# Altium PCB HVPowerModule.PcbDoc (part 1 of 2)
Units mm, origin at the board's own origin, x right, y up, seen from the top; angles counter-clockwise.
Board outline 100 x 60 mm, 2 copper layers (Top Layer, Bottom Layer); 105 components, 66 nets, 450 pads, 567 vias.
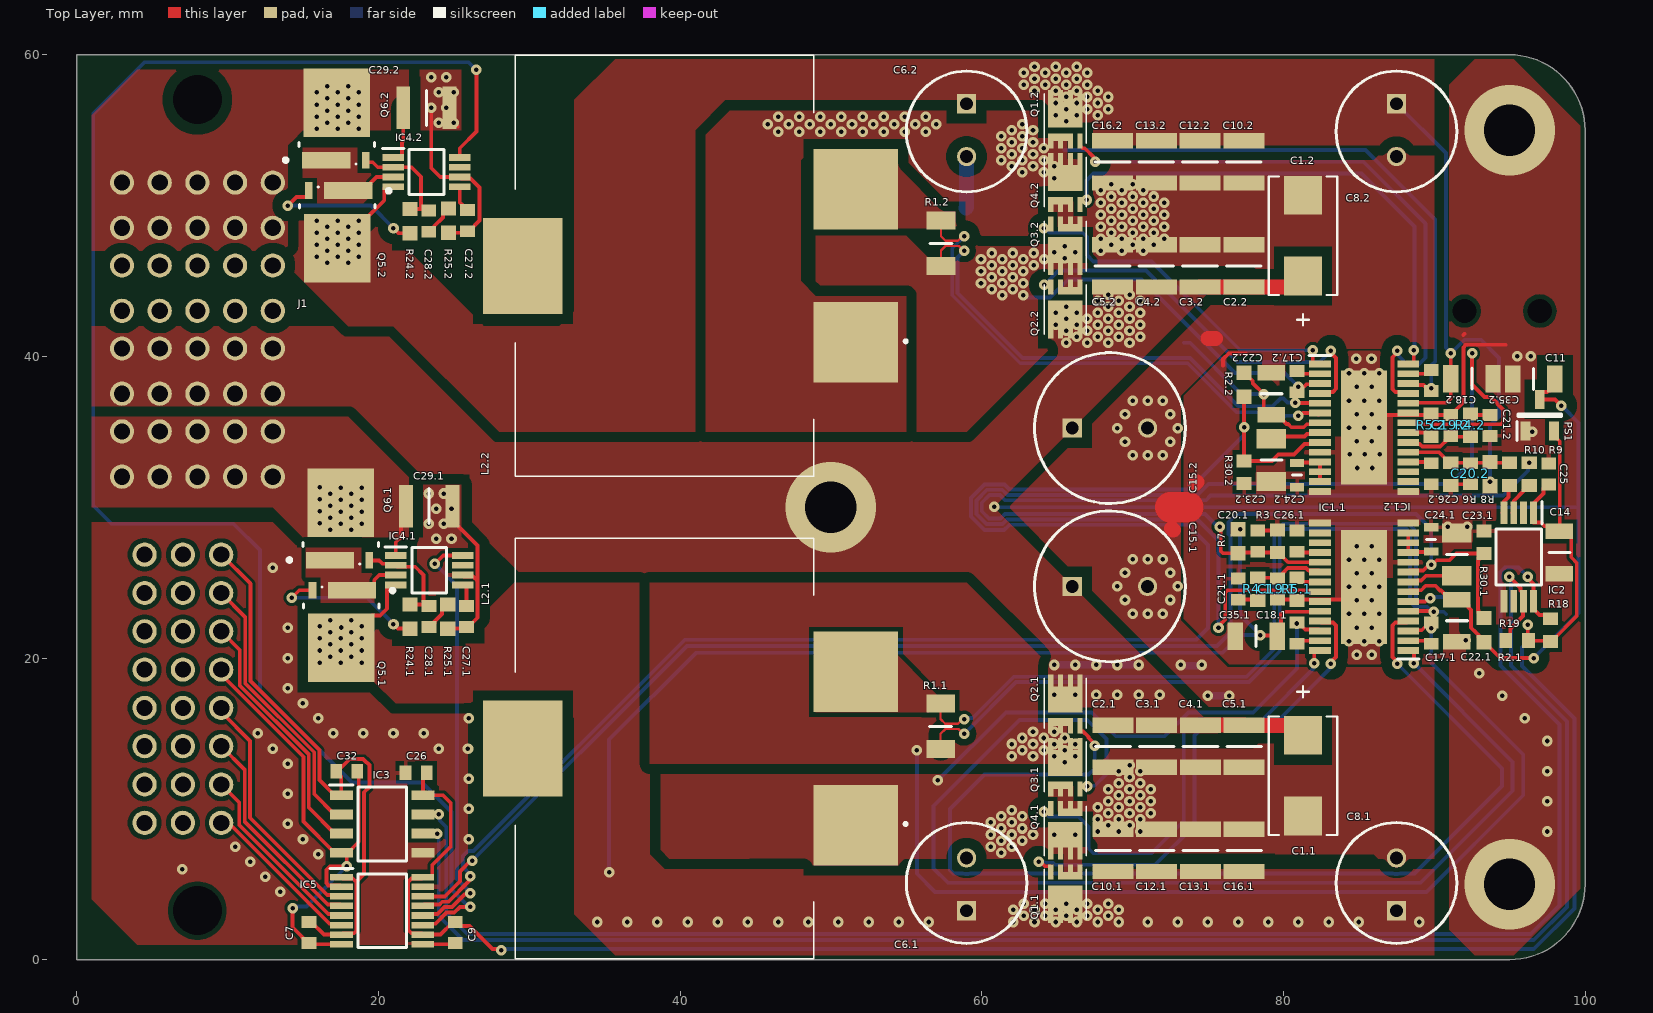
[diagram p0: Top Layer view]
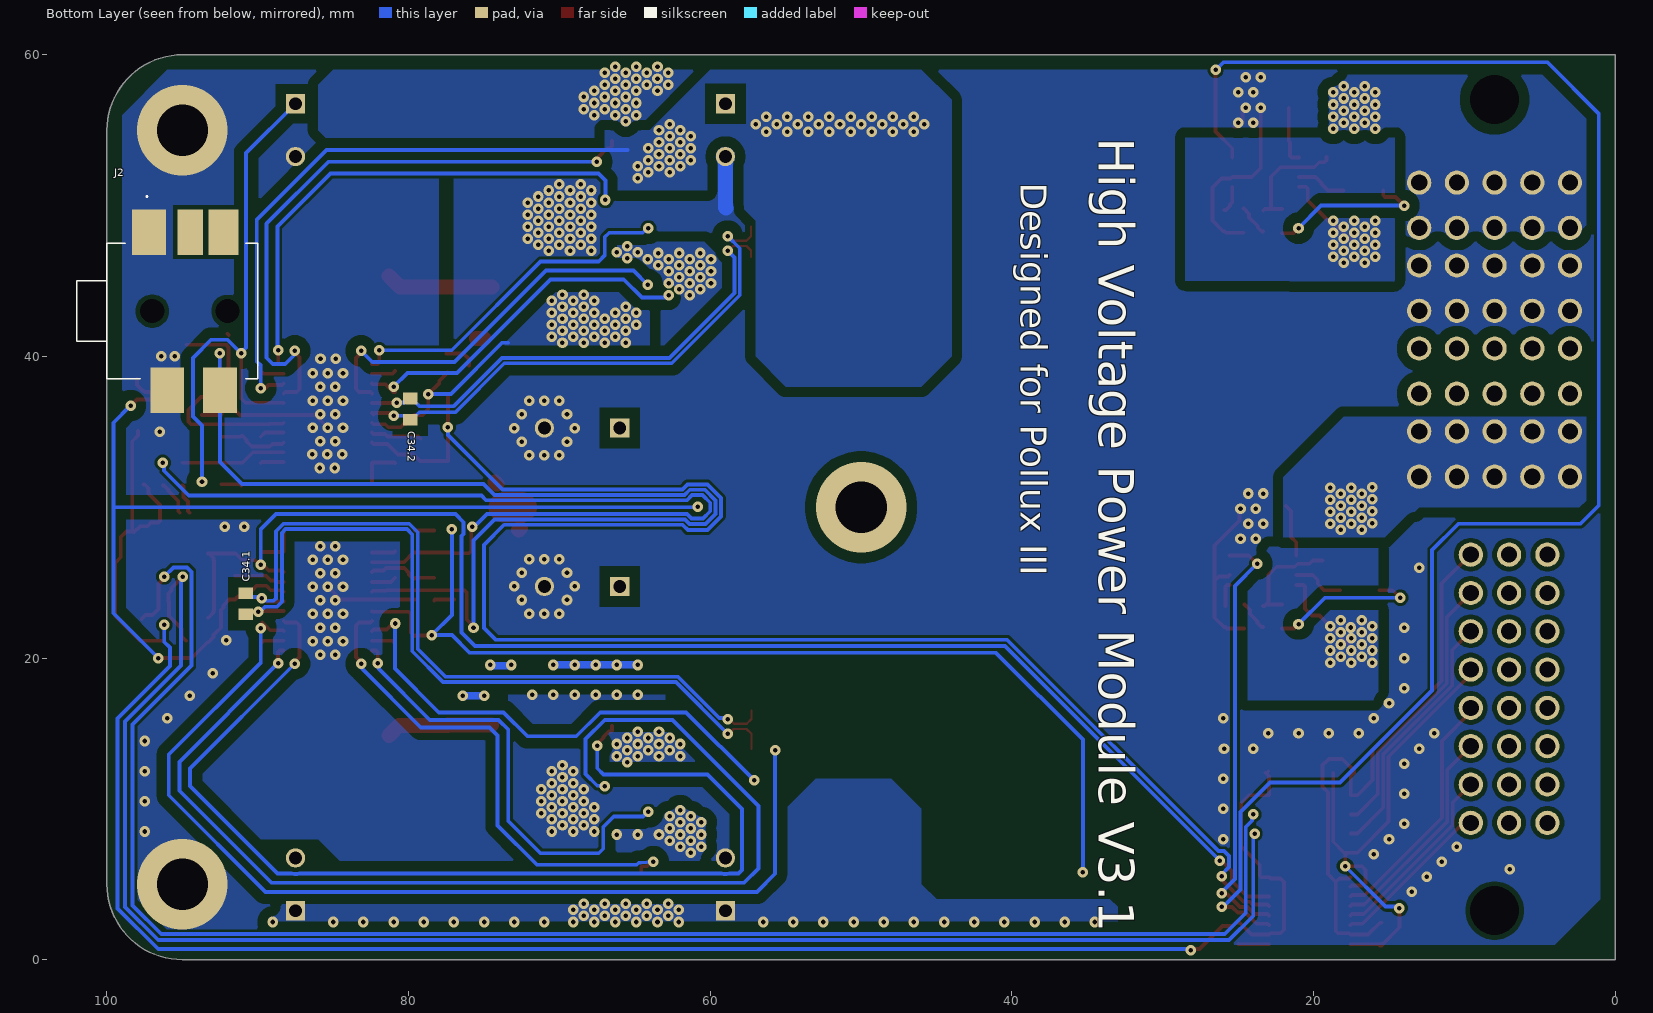
[diagram p1: Bottom Layer view, seen from below]
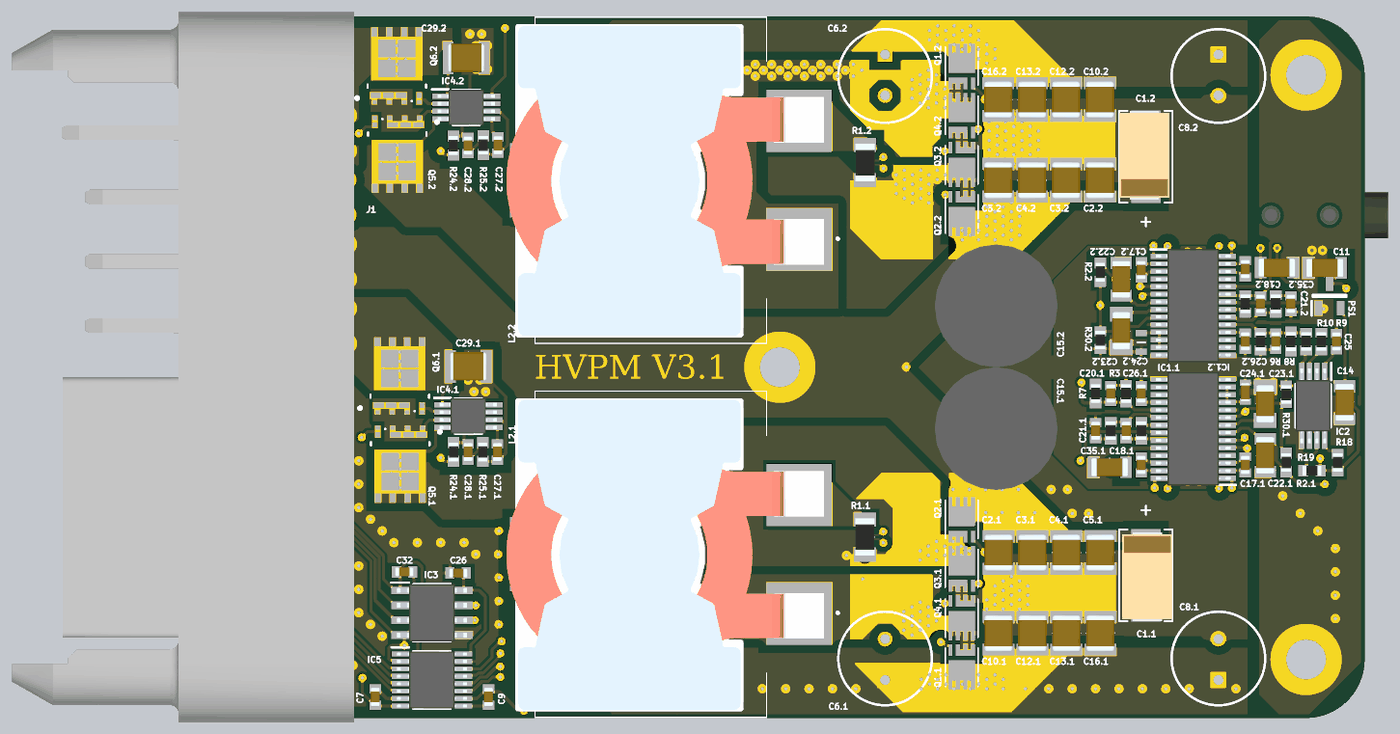
[diagram p3: 3D render of the assembled board from above, using the file's embedded part models]
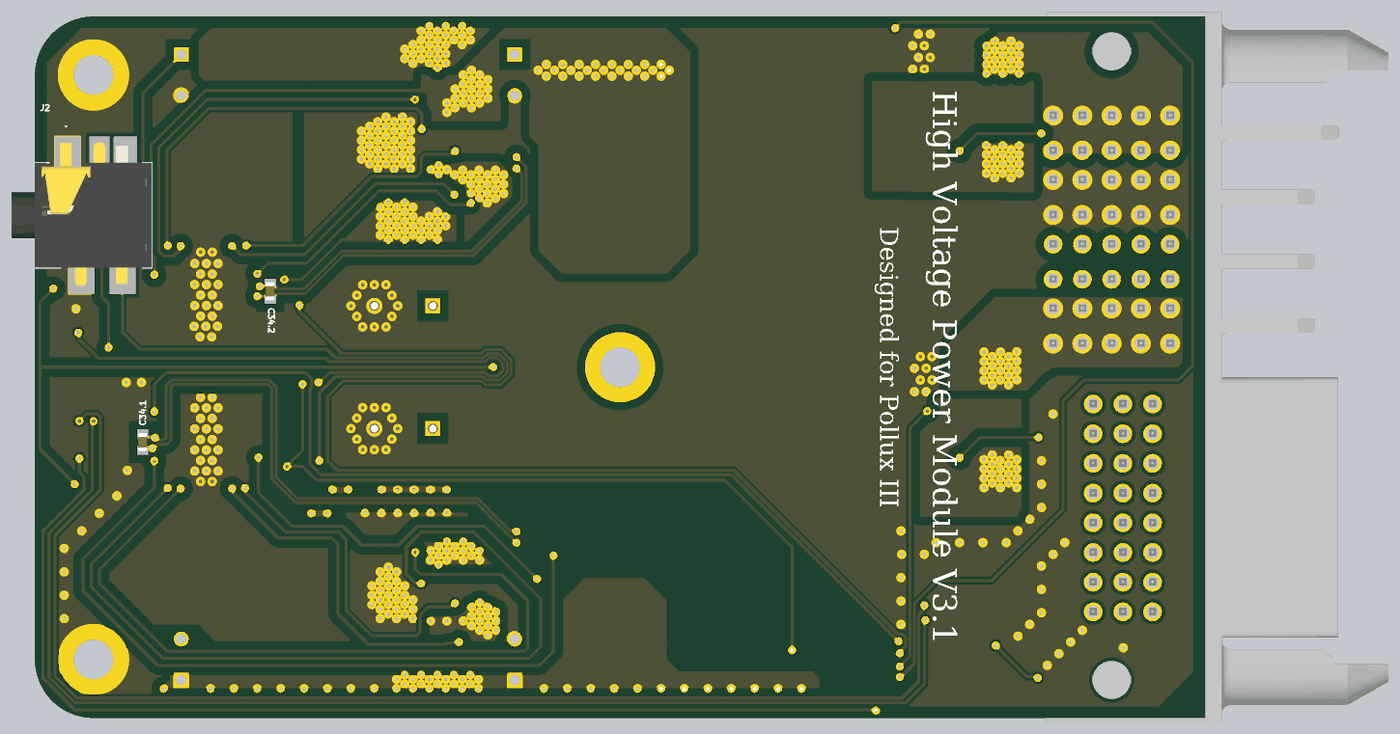
[diagram p4: 3D render of the assembled board from below, using the file's embedded part models]

## Layer stack, top to bottom
Top Solder: solder mask 0.0102, Solder Resist, Dk 3.5
Top Layer: signal copper 0.035
Dielectric 1: dielectric 0.32, FR-4, Dk 4.8
Bottom Layer: signal copper 0.035
Bottom Solder: solder mask 0.0102, Solder Resist, Dk 3.5

## Board outline
0,0 0,60 94.987,60 cw(c94.987,54.987) 100,54.987 100,5 cw(c95,5) 95,0

## Design rules (kind name [scope] priority, off if disabled: settings)
Clearance "High voltage Clearance 2" [InNetClass('HV2') vs Not InNetClass('HV1')] p1: gap=0.7 ignorepadtopadclearanceinfootprint=TRUE except(0.1: Arc-Text Track-Text SMDPad-Text THPad-Text Via-Text Fill-Text Poly-Text Region-Text Text-Text Text-Hole; 0.2: Arc-Arc Arc-Track Arc-SMDPad Track-Track Track-SMDPad; 0.3: Arc-THPad Arc-Via Arc-Hole Track-THPad Track-Via Track-Hole SMDPad-SMDPad SMDPad-THPad SMDPad-Via SMDPad-Hole THPad-Hole Via-Hole; 0.4: THPad-THPad THPad-Via Via-Via)
Clearance "High voltage Clearance 3" [InNetClass('HV3') vs Not InNetClass('HV4')] p2: gap=0.7 ignorepadtopadclearanceinfootprint=TRUE except(0.1: Arc-Text Track-Text SMDPad-Text THPad-Text Via-Text Fill-Text Poly-Text Region-Text Text-Text Text-Hole; 0.2: Arc-Arc Arc-Track Arc-SMDPad Track-Track Track-SMDPad; 0.3: Arc-THPad Arc-Via Arc-Hole Track-THPad Track-Via Track-Hole SMDPad-SMDPad SMDPad-THPad SMDPad-Via SMDPad-Hole THPad-Hole Via-Hole; 0.4: THPad-THPad THPad-Via Via-Via)
Clearance "High voltage Clearance 4" [InNetClass('HV4') vs Not InNetClass('HV3')] p3: gap=0.7 ignorepadtopadclearanceinfootprint=TRUE except(0.1: Arc-Text Track-Text SMDPad-Text THPad-Text Via-Text Fill-Text Poly-Text Region-Text Text-Text Text-Hole; 0.2: Arc-Arc Arc-Track Arc-SMDPad Track-Track Track-SMDPad; 0.3: Arc-THPad Arc-Via Arc-Hole Track-THPad Track-Via Track-Hole SMDPad-SMDPad SMDPad-THPad SMDPad-Via SMDPad-Hole THPad-Hole Via-Hole; 0.4: THPad-THPad THPad-Via Via-Via)
Clearance "High voltage Clearance 1" [InNetClass('HV1') vs Not InNetClass('HV2')] p4: gap=0.7 ignorepadtopadclearanceinfootprint=TRUE except(0.1: Arc-Text Track-Text SMDPad-Text THPad-Text Via-Text Fill-Text Poly-Text Region-Text Text-Text Text-Hole; 0.2: Arc-Arc Arc-Track Arc-SMDPad Track-Track Track-SMDPad; 0.3: Arc-THPad Arc-Via Arc-Hole Track-THPad Track-Via Track-Hole SMDPad-SMDPad SMDPad-THPad SMDPad-Via SMDPad-Hole THPad-Hole Via-Hole; 0.4: THPad-THPad THPad-Via Via-Via)
Clearance "General High voltage Clearance" [InNetClass('HV')] p5: gap=0.7 ignorepadtopadclearanceinfootprint=TRUE except(0.1: Arc-Text Track-Text SMDPad-Text THPad-Text Via-Text Fill-Text Poly-Text Region-Text Text-Text Text-Hole; 0.2: Arc-Arc Arc-Track Arc-SMDPad Track-Track Track-SMDPad; 0.3: Arc-THPad Arc-Via Arc-Hole Track-THPad Track-Via Track-Hole SMDPad-SMDPad SMDPad-THPad SMDPad-Via SMDPad-Hole THPad-Hole Via-Hole; 0.4: THPad-THPad THPad-Via Via-Via)
Clearance [All] p6: gap=0.102 ignorepadtopadclearanceinfootprint=TRUE except(0.2: Arc-Fill Arc-Poly Arc-Region Track-Fill Track-Poly Track-Region Via-Fill Via-Poly Via-Region; 0.3: SMDPad-Fill SMDPad-Poly SMDPad-Region THPad-Fill THPad-Poly THPad-Region Fill-Fill Fill-Poly Fill-Region Poly-Poly Poly-Region Region-Region)
ComponentClearance [All] p1 off: gap=0.254 collisioncheckmode=3 verticalgap=0.254 showdistances=FALSE
Height [All] p1 off: minheight=0 maxheight=25.4 prefheight=12.7
HoleSize [All] p1: absolutevalues=TRUE maxlimit=5 minlimit=0.2 maxpercent=80.000 minpercent=20.000
HoleToHoleClearance [All] p1: gap=0.4 allowstackedmicrovias=TRUE
MinimumSolderMaskSliver [All] p1: minsoldermaskwidth=0.05
NetAntennae [All] p1: netantennaetolerance=1
PlaneConnect [All] p1: planeconnectstyle=Direct reliefexpansion=0.508 reliefentries=4 reliefconductorwidth=0.254 reliefairgap=0.254
PolygonConnect [HasFootprint('*1608*')] p1: connectstyle=Relief reliefconductorwidth=0.254 reliefentries=4 polygonreliefangle="90 Angle" airgapwidth=0.254
PolygonConnect PolygonConnect_1 [All] p2: connectstyle=Direct reliefconductorwidth=0.254 reliefentries=4 polygonreliefangle="90 Angle" airgapwidth=0.254
RoomDefinition DAC [InComponentClass('DAC')] p1: confinementstyle=ConfineIn formatcopy=TRUE lockcomponents=FALSE outline -25.4,-27.9 25.4,-27.9 25.4,-2.5 -25.4,-2.5
RoomDefinition 24VB [InComponentClass('24VB')] p2: confinementstyle=ConfineIn formatcopy=TRUE lockcomponents=FALSE outline -25.4,-27.9 25.4,-27.9 25.4,-2.5 -25.4,-2.5
RoomDefinition D2 [InComponentClass('D2')] p3 off: confinementstyle=ConfineIn formatcopy=TRUE lockcomponents=FALSE outline 101.1,12.1 110.1,12.1 110.1,21.4 101.1,21.4
RoomDefinition D1 [InComponentClass('D1')] p4 off: confinementstyle=ConfineIn formatcopy=TRUE lockcomponents=FALSE outline 101.1,1.5 109.6,1.5 109.6,10.8 101.1,10.8
RoomDefinition Module [InComponentClass('Module')] p5 off: confinementstyle=ConfineIn formatcopy=TRUE lockcomponents=FALSE outline 59.25,-10.5 2,-10.5 2,-16.5 59.25,-16.5
RoomDefinition 24VA [InComponentClass('24VA')] p6 off: confinementstyle=ConfineIn formatcopy=TRUE lockcomponents=FALSE outline -25.4,-27.9 25.4,-27.9 25.4,-2.5 -25.4,-2.5
RoutingVias [All] p1: holewidth=0.711 width=1.27 viastyle="Through Hole" minholewidth=0.2 minwidth=0.4 maxholewidth=0.711 maxwidth=1.27
SilkToSilkClearance [All] p1: silktosilkclearance=0.2
SilkToSolderMaskClearance [IsPad] p1: minsilkscreentomaskgap=0.1 clearancetoexposedcopper=TRUE
SolderMaskExpansion [All] p1: expansion=0.05 istentingtop=FALSE
Width [All] p1: maxlimit=2 minlimit=0.1 preferedwidth=0.254
21 further rules are at their usual default settings.

## Classes and differential pairs
net class HV1: SW1.1 SW1.2
channel class Converter: 24VA 24VB
component class 24VA: C1.1 C1.1.1 C2.1 C3.1 C4.1 C5.1 C6.1 C8.1 C10.1 C10.1.1 C12.1 C12.1.1 C13.1 C13.1.1 C15.1 C16.1 C16.1.1 C17.1 C18.1 C19.1 C20.1 C21.1 C22.1 C23.1 C24.1 C26.1 C34.1 C35.1 IC1.1 L2.1 L2.1.1 Q1.1 Q2.1 Q3.1 Q4.1 R1.1 R1.1.1 R2.1 R4.1 R5.1 R30.1
component class 24VB: C1.1.2 C1.2 C2.2 C3.2 C4.2 C5.2 C6.2 C8.2 C10.1.2 C10.2 C12.1.2 C12.2 C13.1.2 C13.2 C15.2 C16.1.2 C16.2 C17.2 C18.2 C19.2 C20.2 C21.2 C22.2 C23.2 C24.2 C26.2 C34.2 C35.2 IC1.2 L2.1.2 L2.2 Q1.2 Q2.2 Q3.2 Q4.2 R1.1.2 R1.2 R2.2 R4.2 R5.2 R30.2
net class HV: 24V.1 24V.2 24VA_OUT 24VB_OUT HDRV1.1 HDRV1.2 HDRV2.1 HDRV2.2 SW2.1 SW2.2 V_IN
channel class IdealDiode: D1 D2
component class D2: C27.2 C28.2 C29.2 IC4.2 IC4_15V_Diode2 Q5.2 Q6.2 R24.2 R25.2
component class D1: C27.1 C28.1 C29.1 IC4.1 IC4_15V_Diode1 Q5.1 Q6.1 R24.1 R25.1
component class DAC: C25 C26 C32 IC2 IC3 R18 R19
net class HV2: LSN.1 LSN.2
component class Module: C7 C9 C11 C14 IC5 J1 J2 PS1 R3 R6 R7 R8 R9 R10

## Components (designator, comment, footprint, x,y, rotation, side; value= is the part's Value field where it differs from the comment)
C1.1 "T598D336M035ATE065" CAPMP7.6X4.3_3.1N_KEM 81.3,12.2 r270 top value=33u (schematic designator C1)
C1.2 "T598D336M035ATE065" CAPMP7.6X4.3_3.1N_KEM 81.3,48 r90 top value=33u (schematic designator C1)
C2.1 "CGA6P1X7R1N106M250AC" CAPC3225X280N 68.7,14.15 r90 top value=10u (schematic designator C2)
C2.2 "CGA6P1X7R1N106M250AC" CAPC3225X280N 77.375,46 r270 top value=10u (schematic designator C2)
C3.1 "CGA6P1X7R1N106M250AC" CAPC3225X280N 71.6,14.15 r90 top value=10u (schematic designator C3)
C3.2 "CGA6P1X7R1N106M250AC" CAPC3225X280N 74.475,46 r270 top value=10u (schematic designator C3)
C4.1 "CGA6P1X7R1N106M250AC" CAPC3225X280N 74.5,14.15 r90 top value=10u (schematic designator C4)
C4.2 "CGA6P1X7R1N106M250AC" CAPC3225X280N 71.575,46 r270 top value=10u (schematic designator C4)
C5.1 "CGA6P1X7R1N106M250AC" CAPC3225X280N 77.4,14.15 r90 top value=10u (schematic designator C5)
C5.2 "CGA6P1X7R1N106M250AC" CAPC3225X280N 68.675,46 r270 top value=10u (schematic designator C5)
C6.1 "A750MW687M1VAAE018" CAPPRD500W65D1000H1800#1 59,5 r90 top value=680u (schematic designator C6)
C6.2 "A750MW687M1VAAE018" CAPPRD500W65D1000H1800#1 59,55 r270 top value=680u (schematic designator C6)
C7 "C0603C104K5RACTU" CAPC1608X95N 15.4,1.8 r270 top value=100n
C8.1 "A750MW687M1VAAE018" CAPPRD500W65D1000H1800#1 87.5,5 r90 top value=680u (schematic designator C8)
C8.2 "A750MW687M1VAAE018" CAPPRD500W65D1000H1800#1 87.5,55 r270 top value=680u (schematic designator C8)
C9 "C0603C104K5RACTU" CAPC1608X95N 25.1,1.8 r270 top value=100n
C10.1 "CGA6P1X7R1N106M250AC" CAPC3225X280N 68.7,7.25 r270 top value=10u (schematic designator C10)
C10.2 "CGA6P1X7R1N106M250AC" CAPC3225X280N 77.375,52.9 r90 top value=10u (schematic designator C10)
C11 "C1206C105K5RAC" CAPC3216X110N 96.6,38.5 r0 top value=1u
C12.1 "CGA6P1X7R1N106M250AC" CAPC3225X280N 71.6,7.25 r270 top value=10u (schematic designator C12)
C12.2 "CGA6P1X7R1N106M250AC" CAPC3225X280N 74.475,52.9 r90 top value=10u (schematic designator C12)
C13.1 "CGA6P1X7R1N106M250AC" CAPC3225X280N 74.5,7.25 r270 top value=10u (schematic designator C13)
C13.2 "CGA6P1X7R1N106M250AC" CAPC3225X280N 71.575,52.9 r90 top value=10u (schematic designator C13)
C14 "C1206C105K5RAC" CAPC3216X110N 98.3,27 r90 top value=1u
C15.1 "A750MW687M1VAAE018" CAPPRD500W65D1000H1800#2 66,24.75 r0 top value=680u (schematic designator C15)
C15.2 "A750MW687M1VAAE018" CAPPRD500W65D1000H1800#2 66,35.25 r0 top value=680u (schematic designator C15)
C16.1 "CGA6P1X7R1N106M250AC" CAPC3225X280N 77.4,7.25 r270 top value=10u (schematic designator C16)
C16.2 "CGA6P1X7R1N106M250AC" CAPC3225X280N 68.675,52.9 r90 top value=10u (schematic designator C16)
C17.1 "C0603C104K5RACTU" CAPC1608X95N 89.8,21.65 r90 top value=100n (schematic designator C17)
C17.2 "C0603C104K5RACTU" CAPC1608X95N 80.902,38.323 r270 top value=100n (schematic designator C17)
C18.1 "C0603C104K5RACTU" CAPC1608X95N 80.9,21.65 r270 top value=100n (schematic designator C18)
C18.2 "C0603C104K5RACTU" CAPC1608X95N 89.8,38.4 r90 top value=100n (schematic designator C18)
C19.1 "C0603C689C5GACTU" CAPC1608X87N 79.602,24.573 r90 top value=6.8p (schematic designator C19)
C19.2 "C0603C689C5GACTU" CAPC1608X87N 91.102,35.423 r270 top value=6.8p (schematic designator C19)
C20.1 "C0603C221K5RACTU" CAPC1608X87N 78.3,27.75 r270 top value=220p (schematic designator C20)
C20.2 "C0603C221K5RACTU" CAPC1608X87N 92.402,32.223 r90 top value=220p (schematic designator C20)
C21.1 "C0603C102J5RACTU" CAPC1608X95N 77.002,24.573 r270 top value=1n (schematic designator C21)
C21.2 "C0603C102J5RACTU" CAPC1608X95N 93.702,35.423 r90 top value=1n (schematic designator C21)
C22.1 "C1206C105M5RECTU" CAPC3216X130N 91.502,22.473 r270 top value=1uF (schematic designator C22)
C22.2 "C1206C105M5RECTU" CAPC3216X130N 79.202,37.523 r90 top value=1uF (schematic designator C22)
C23.1 "C1206X475M5RACAUTO" CAPC3316X195N 91.502,26.873 r90 top value=4.7uF (schematic designator C23)
C23.2 "C1206X475M5RACAUTO" CAPC3316X195N 79.202,33.123 r270 top value=4.7uF (schematic designator C23)
C24.1 "C0603C474K4PACTU" CAPC1608X90N 89.802,27.873 r90 top value=470n (schematic designator C24)
C24.2 "C0603C474K4PACTU" CAPC1608X90N 80.902,32.123 r270 top value=470n (schematic designator C24)
C25 "C0603C104K5RACTU" CAPC1608X95N 97.6,32.2 r270 top value=100n
C26 "C0603C104K5RACTU" CAPC1608X95N 22.5,12.4 r0 top value=100n
C26.1 "C0603C104K5RACTU" CAPC1608X95N 80.9,27.75 r270 top value=100n (schematic designator C26)
C26.2 "C0603C104K5RACTU" CAPC1608X95N 89.802,32.223 r90 top value=100n (schematic designator C26)
C27.1 "C0603C104K5RACTU" CAPC1608X95N 25.85,22.75 r90 top value=100n (schematic designator C27)
C27.2 "C0603C104K5RACTU" CAPC1608X95N 25.9,49 r90 top value=100n (schematic designator C27)
C28.1 "C0603C103K5RACTU" CAPC1608X95N 23.35,22.75 r90 top value=10n (schematic designator C28)
C28.2 "C0603C103K5RACTU" CAPC1608X95N 23.335,48.97 r90 top value=10n (schematic designator C28)
C29.1 "C3225X7R2A106K250AC" CAPC3225X230N 23.365,30.075 r180 top value=10u (schematic designator C29)
C29.2 "C3225X7R2A106K250AC" CAPC3225X230N 23.185,56.47 r180 top value=10u (schematic designator C29)
C32 "C0603C104K5RACTU" CAPC1608X95N 17.9,12.5 r180 top value=100n
C34.1 "C0603C102J5RACTU" CAPC1608X95N 90.8,23.6 r270 bottom value=1n (schematic designator C34)
C34.2 "C0603C102J5RACTU" CAPC1608X95N 79.9,36.5 r90 bottom value=1n (schematic designator C34)
C35.1 "C1206C105M5RECTU" CAPC3216X130N 78.2,21.45 r180 top value=1uF (schematic designator C35)
C35.2 "C1206C105M5RECTU" CAPC3216X130N 92.502,38.523 r0 top value=1uF (schematic designator C35)
IC1.1 "LT8392JFE#PBF" SOP65P640X120-29N 85.352,24.723 r180 top (schematic designator IC1)
IC1.2 "LT8392JFE#PBF" SOP65P640X120-29N 85.352,35.273 r0 top (schematic designator IC1)
IC2 "MCP47FEB02A0-E_ST" SOP65P640X120-8N 95.6,26.7 r270 top
IC3 "ADUM1251ARZ" SOIC127P600X175-8N 20.25,9 r0 top
IC4.1 "LTC4372CMS8#TRPBF" SOP65P490X110-8N 23.365,25.825 r0 top (schematic designator IC4)
IC4.2 "LTC4372CMS8#TRPBF" SOP65P490X110-8N 23.185,52.22 r0 top (schematic designator IC4)
IC5 "SI8640EB-B-IU" SOP64P600X175-16N 20.25,3.25 r0 top
J1 "46437-3001" 464373001 8,57.025 r270 top
J2 "980TR" 980TR 96.005,43 r180 bottom
L2.1 "PQ2614BHA-100K" PQ2614BLA1R0K 41,14 r90 top value=10u (schematic designator L2)
L2.2 "PQ2614BHA-100K" PQ2614BLA1R0K 41,46 r90 top value=10u (schematic designator L2)
PS1 "MCP1799T-3302H_TT" SOT95P237X112-3N 97,36.1 r90 top
Q1.1 "BSZ034N04LS" BSZ060NE2LS 65.55,3.7 r90 top (schematic designator Q1)
Q1.2 "BSZ034N04LS" BSZ060NE2LS 65.55,56.4 r270 top (schematic designator Q1)
Q2.1 "BSZ034N04LS" BSZ060NE2LS 65.55,17.63 r270 top (schematic designator Q2)
Q2.2 "BSZ034N04LS" BSZ060NE2LS 65.55,42.47 r90 top (schematic designator Q2)
Q3.1 "BSZ034N04LS" BSZ060NE2LS 65.55,13.43 r270 top (schematic designator Q3)
Q3.2 "BSZ034N04LS" BSZ060NE2LS 65.55,46.67 r90 top (schematic designator Q3)
Q4.1 "BSZ034N04LS" BSZ060NE2LS 65.55,7.9 r90 top (schematic designator Q4)
Q4.2 "BSZ034N04LS" BSZ060NE2LS 65.55,52.2 r270 top (schematic designator Q4)
Q5.1 "BSC016N06NSATMA1" FP-PG-TDSON-8-MFG 17.535,21.725 r180 top (schematic designator Q5)
Q5.2 "BSC016N06NSATMA1" FP-PG-TDSON-8-MFG 17.285,48.225 r180 top (schematic designator Q5)
Q6.1 "BSC016N06NSATMA1" FP-PG-TDSON-8-MFG 17.5,29.25 r0 top (schematic designator Q6)
Q6.2 "BSC016N06NSATMA1" FP-PG-TDSON-8-MFG 17.25,55.768 r0 top (schematic designator Q6)
R1.1 "PCS1206FR0030ET" RESC3216X68N 57.275,15.475 r90 top value=3m (schematic designator R1)
R1.2 "PCS1206FR0030ET" RESC3216X68N 57.3,47.5 r90 top value=3m (schematic designator R1)
R2.1 "CRCW0603100KJNEAC" RESC1608X55N 93.3,21.85 r270 top value=100k (schematic designator R2)
R2.2 "CRCW0603100KJNEAC" RESC1608X55N 77.402,38.123 r90 top value=100k (schematic designator R2)
R3 "CRCW06034K32FKEA" RESC1608X50N 79.6,27.75 r90 top value=4.32k
R4.1 "CRCW0603255KFKEAC" RESC1608X50N 78.302,24.573 r90 top value=255k (schematic designator R4)
R4.2 "CRCW0603255KFKEAC" RESC1608X50N 92.402,35.423 r270 top value=255k (schematic designator R4)
R5.1 "CRCW0603316KFKTA" RESC1608X50N 80.902,24.573 r90 top value=316k (schematic designator R5)
R5.2 "CRCW0603316KFKTA" RESC1608X50N 89.802,35.423 r270 top value=316k (schematic designator R5)
R6 "CRCW06034K32FKEA" RESC1608X50N 91.1,32.2 r270 top value=4.32k
R7 "CRCW0603100KJNEAC" RESC1608X55N 77,27.75 r90 top value=100k
R8 "CRCW0603100KJNEAC" RESC1608X55N 93.7,32.2 r270 top value=100k
R9 "CRCW060322K1FKEB" RESC1608X50N 96.3,32.2 r270 top value=22.1k
R10 "CRCW060322K1FKEB" RESC1608X50N 95,32.2 r270 top value=22.1k
R18 "CRCW06035K60JNEAC" RESC1608X50N 97.7,21.85 r270 top value=5.6k
R19 "CRCW06035K60JNEAC" RESC1608X50N 95.5,21.15 r0 top value=5.6k
R24.1 "CRCW060310R0JNEAC" RESC1608X55N 22.1,22.75 r270 top value=10 (schematic designator R24)
R24.2 "CRCW060310R0JNEAC" RESC1608X55N 22.085,48.97 r270 top value=10 (schematic designator R24)
R25.1 "CRCW06031K00FKECC" RESC1608X55N 24.6,22.75 r90 top value=1k (schematic designator R25)
R25.2 "CRCW06031K00FKECC" RESC1608X55N 24.65,49 r90 top value=1k (schematic designator R25)
R30.1 "CRCW06038K87FKTA" RESC1608X50N 93.302,27.673 r270 top value=8.87k (schematic designator R30)
R30.2 "CRCW06038K87FKTA" RESC1608X50N 77.402,32.323 r90 top value=8.87k (schematic designator R30)

## Footprints (in the part's own frame and the unit in brackets; to place one, negate y for a bottom-side part, rotate by r counter-clockwise, add the part's x,y. Pads: shape width x height; smd on the part's side, far side on the other; paste and mask are expansions set on the pad)
980TR [mm]
  rect 2.24x3.02 smd: 1(-1.205,5.245) 4(-0.005,-5.245) 5(3.495,-5.245)
  rect 2.01x3.02 smd: 2(3.73,5.245)
  rect 1.7x3.02 smd: 3(1.515,5.245)
  round 0.8 hole 1.6 unplated: MH1(-0.995,0) MH2(4.005,0)
  silkscreen extent -6,-4.49 6,7.65, body extent -6,-6.06 6.01,6.23, height 4.31
464373001 [mm]
  round 1.625 hole 3.25 unplated: MH1(0,0) MH2(53.772,0)
  round 1.605 hole 1.07: P1(5.5,2.5) P1(5.5,5) P1(5.5,0) P1(5.5,-5) P1(5.5,-2.5) P1(8.5,5) P1(8.5,-2.5) P1(8.5,0) P1(8.5,2.5) P1(8.5,-5) P2(11,5) P2(11,-2.5) P2(11,0) P2(11,2.5) P2(11,-5) P2(14,-5) P2(14,-2.5) P2(14,0) P2(14,2.5) P2(14,5) P3(16.5,-5) P3(16.5,-2.5) P3(16.5,0) P3(16.5,2.5) P3(16.5,5) P3(19.5,-5) P3(19.5,-2.5) P3(19.5,0) P3(19.5,2.5) P3(19.5,5) P4(22,-5) P4(22,-2.5) P4(22,0) P4(22,2.5) P4(22,5) P4(25,-5) P4(25,-2.5) P4(25,0) P4(25,2.5) P4(25,5) S1(30.17,-3.5) S2(32.71,-3.5) S3(35.25,-3.5) S4(37.79,-3.5) S5(40.33,-3.5) S6(42.87,-3.5) S7(45.41,-3.5) S8(47.95,-3.5) S9(30.17,-0.96) S10(32.71,-0.96) S11(35.25,-0.96) S12(37.79,-0.96) S13(40.33,-0.96) S14(42.87,-0.96) S15(45.41,-0.96) S16(47.95,-0.96) S17(30.17,1.58) S18(32.71,1.58) S19(35.25,1.58) S20(37.79,1.58) S21(40.33,1.58) S22(42.87,1.58) S23(45.41,1.58) S24(47.95,1.58)
  body extent -3.35,-23.65 57.41,5.6, height 3.96
BSZ060NE2LS [mm]
  rect 0.8x0.34 smd: 1(-0.87,0.975) 2(-0.87,0.325) 3(-0.87,-0.325) 4(-0.87,-0.975)
  rect 1.71x2.29 smd: 1(0.38,0)
  rect 0.5x0.34 smd: 5(1.87,-0.65) 5(1.87,0)
  rect 1x0.34 smd: 5(2.12,-0.975) 6(2.12,-0.325) 7(2.12,0.325) 8(2.12,0.975)
  silkscreen extent -1.02,-1.4 2.29,1.4
CAPC1608X87N [mm]
  rect 0.78x0.98 smd: 1(-0.7,0) 2(0.7,0)
  body extent -0.8,-0.4 0.8,0.4, height 0.87
CAPC1608X90N [mm]
  rect 0.54x0.94 smd: 1(-0.8,0) 2(0.8,0)
  silkscreen extent 0,-0.3 0,0.3, body extent -0.8,-0.4 0.8,0.4, height 0.9
CAPC1608X95N [mm]
  rect 0.78x0.98 smd: 1(-0.7,0) 2(0.7,0)
  body extent -0.8,-0.4 0.8,0.4, height 0.95
CAPC3216X110N [mm]
  rect 1.02x1.82 smd: 1(-1.4,0) 2(1.4,0)
  silkscreen extent 0,-0.7 0,0.7, body extent -1.6,-0.8 1.6,0.8, height 1.1
CAPC3216X130N [mm]
  rect 1.02x1.82 smd: 1(-1.4,0) 2(1.4,0)
  silkscreen extent 0,-0.7 0,0.7, body extent -1.6,-0.8 1.6,0.8, height 1.3
CAPC3225X230N [mm]
  rect 0.92x2.82 smd: 1(-1.54,0) 2(1.54,0)
  silkscreen extent 0,-1.15 0,1.15, body extent -1.6,-1.25 1.6,1.25, height 2.3
CAPC3225X280N [mm]
  rect 1.02x2.72 smd: 1(-1.4,0) 2(1.4,0)
  silkscreen extent 0,-1.15 0,1.15, body extent -1.6,-1.25 1.6,1.25, height 2.8
CAPC3316X195N [mm]
  rect 1.28x1.96 smd: 1(-1.42,0) 2(1.42,0)
  silkscreen extent 0,-0.7 0,0.7, body extent -1.65,-0.8 1.65,0.8, height 1.95
CAPMP7.6X4.3_3.1N_KEM [mm]
  rect 2.56x2.5 smd paste+0 mask+0: 1(-2.672,0) 2(2.672,0)
  silkscreen extent -5.95,-2.28 3.93,2.28, body extent -3.67,-2.02 3.93,2.28, height 3.15
CAPPRD500W65D1000H1800#1 [mm]
  rect 1.275x1.275 hole 0.85: 1(-1.75,0)
  round 1.275 hole 0.85: 2(1.75,0)
  silkscreen extent -3.91,-4 4.09,4
CAPPRD500W65D1000H1800#2 [mm]
  rect 1.275x1.275 hole 0.85: 1(0,0)
  round 1.275 hole 0.85: 2(5,0)
  silkscreen extent -2.5,-5 7.5,5, body extent -2.75,-5.25 7.75,5.25, height 28
FP-PG-TDSON-8-MFG [mm]
  rect 3.2x1.1 smd paste-1000 mask-1000: 1-2-3(-0.715,-2.775)
  rect 0.5x1.1 smd paste-1000 mask+0: 4(1.905,-2.775)
  rect 4.41x4.55 smd paste-1000 mask-1000: 5-6-7-8(0,1.05)
  silkscreen extent -3.53,-3 2.5,-1.6, body extent -2.68,-3.42 2.68,3.42, height 0.25
PQ2614BLA1R0K [mm]
  rect 5.33x5.59 smd: 1(-5.075,-10.655) 2(5.08,-10.655)
  rect 6.35x5.28 smd: MP1(0,11.42)
  silkscreen extent -13.95,-14.06 13.95,11.94, body extent -13.45,-12.79 13.35,14.39, height 15
RESC1608X50N [mm]
  rect 0.85x1 smd: 1(-0.75,0) 2(0.75,0)
  body extent -0.79,-0.43 0.79,0.43, height 0.5
RESC1608X55N [mm]
  rect 0.95x1 smd: 1(-0.8,0) 2(0.8,0)
  body extent -0.8,-0.4 0.8,0.4, height 0.55
RESC3216X68N [mm]
  rect 1.2x1.9 smd: 1(-1.5,0) 2(1.5,0)
  silkscreen extent 0,-0.72 0,0.72, body extent -1.6,-0.82 1.6,0.82, height 0.68
SOIC127P600X175-8N [mm]
  rect 1.525x0.65 smd: 1(-2.712,1.905) 2(-2.712,0.635) 3(-2.712,-0.635) 4(-2.712,-1.905) 5(2.712,-1.905) 6(2.712,-0.635) 7(2.712,0.635) 8(2.712,1.905)
  silkscreen extent -3.47,-2.45 1.6,2.58, body extent -3,-2.45 3,2.45, height 1.75
SOP64P600X175-16N [mm]
  rect 1.5x0.435 smd: 1(-2.7,2.222) 2(-2.7,1.588) 3(-2.7,0.952) 4(-2.7,0.318) 5(-2.7,-0.318) 6(-2.7,-0.952) 7(-2.7,-1.588) 8(-2.7,-2.222) 9(2.7,-2.222) 10(2.7,-1.588) 11(2.7,-0.952) 12(2.7,-0.318) 13(2.7,0.318) 14(2.7,0.952) 15(2.7,1.588) 16(2.7,2.222)
  silkscreen extent -3.45,-2.44 1.6,2.79, body extent -3,-2.44 3,2.44, height 1.75
SOP65P490X110-8N [mm]
  rect 1.425x0.45 smd: 1(-2.212,0.975) 2(-2.212,0.325) 3(-2.212,-0.325) 4(-2.212,-0.975) 5(2.212,-0.975) 6(2.212,-0.325) 7(2.212,0.325) 8(2.212,0.975)
  silkscreen extent -2.93,-1.5 1.15,1.55, body extent -2.45,-1.5 2.45,1.5, height 1.1
SOP65P640X120-8N [mm]
  rect 1.475x0.45 smd: 1(-2.938,0.975) 2(-2.938,0.325) 3(-2.938,-0.325) 4(-2.938,-0.975) 5(2.938,-0.975) 6(2.938,-0.325) 7(2.938,0.325) 8(2.938,0.975)
  silkscreen extent -3.67,-1.5 1.85,1.55, body extent -3.2,-1.5 3.2,1.5, height 1.2
SOP65P640X120-29N [mm]
  rect 1.45x0.45 smd: 1(-2.925,4.225) 2(-2.925,3.575) 3(-2.925,2.925) 4(-2.925,2.275) 5(-2.925,1.625) 6(-2.925,0.975) 7(-2.925,0.325) 8(-2.925,-0.325) 9(-2.925,-0.975) 10(-2.925,-1.625) 11(-2.925,-2.275) 12(-2.925,-2.925) 13(-2.925,-3.575) 14(-2.925,-4.225) 15(2.925,-4.225) 16(2.925,-3.575) 17(2.925,-2.925) 18(2.925,-2.275) 19(2.925,-1.625) 20(2.925,-0.975) 21(2.925,-0.325) 22(2.925,0.325) 23(2.925,0.975) 24(2.925,1.625) 25(2.925,2.275) 26(2.925,2.925) 27(2.925,3.575) 28(2.925,4.225)
  rect 3.05x7.56 smd: 29(0,0)
  silkscreen extent -3.65,4.8 -2.2,4.8, body extent -3.2,-4.85 3.2,4.85, height 1.2
SOT95P237X112-3N [mm]
  rect 1.25x0.65 smd: 1(-1.05,0.95) 2(-1.05,-0.95) 3(1.05,0)
  silkscreen extent -1.68,-1.43 0.08,1.53, body extent -1.18,-1.43 1.18,1.43, height 1.12

## Part data
C1.1 C1.2: "No Description Available", Supplier Part Number 1=80-T598D336M35E65, Built_By=EMA_Frank, Copyright="Copyright (C) 2018 Accelerated Designs. All rights reserved", Manufacturer_Part_Number=T598D336M035ATE065, RefDes=RefDes, Source_Library=Kemet_2020-03-25_3.xlr, SourceLibrary=Kemet_2020-03-25_3, Supplier 1=Mouser, Type=DEV, Vendor=Kemet
C2.1 C2.2 C3.1 C3.2 C4.1 C4.2 C5.1 C5.2 C10.1 C10.2 C12.1 C12.2 C13.1 C13.2 C16.1 C16.2: "Capacitor", Manufacturer_Name=TDK, Mouser Part Number=810-CGA6P1X7R1N106M, Arrow Part Number=CGA6P1X7R1N106M250AC, Arrow Price/Stock=https://www.arrow.com/en/products/cga6p1x7r1n106m250ac/tdk, Datasheet Link=https://product.tdk.com/system/files/dam/doc/product/capacitor/ceramic/mlcc/catalog/mlcc_automotive_general_en.pdf, Height=2.8mm, Manufacturer_Part_Number=CGA6P1X7R1N106M250AC, Mouser Price/Stock=https://www.mouser.co.uk/ProductDetail/TDK/CGA6P1X7R1N106M250AC?qs=gZXFycFWdANNyXbiENuK8Q%3D%3D, Supplier 1=Mouser, Supplier Part Number 1=810-CGA6P1X7R1N106M
C6.1 C6.2 C8.1 C8.2: "Capacitor Polarised", Manufacturer_Name=Kemet, Supplier Part Number 1=80-A750MW687M1VAAE18, Datasheet Link=https://www.kemet.com/specsheet/A750MW687M1VAAE018, Height=18mm, Manufacturer_Part_Number=A750MW687M1VAAE018, Supplier 1=Mouser
C7 C9 C17.1 C17.2 C18.1 C18.2 C25 C26 C26.1 C26.2 C27.1 C27.2 C32: "Capacitor", Manufacturer_Name=Kemet, Mouser Part Number=80-C0603C104K5R, Arrow Part Number=C0603C104K5RACTU, Arrow Price/Stock=https://www.arrow.com/en/products/c0603c104k5ractu/kemet-corporation, Datasheet Link=http://www.farnell.com/datasheets/2205446.pdf, Height=0.95mm, Manufacturer_Part_Number=C0603C104K5RACTU, Mouser Price/Stock=https://www.mouser.co.uk/ProductDetail/KEMET/C0603C104K5RACTU?qs=l5k%252BbMnNDkkVcnZPSAaaiQ%3D%3D, Supplier 1=Mouser, Supplier Part Number 1=80-C0603C104K5R
C11 C14: "Capacitor", Manufacturer_Name=KEMET, Mouser Part Number=80-C1206C105K5RAC, Arrow Part Number=C1206C105K5RAC, Arrow Price/Stock=https://www.arrow.com/en/products/c1206c105k5rac/kemet-corporation, Datasheet Link=https://www.kemet.com/specsheet/C1206C105K5RACTU, Height=1.1mm, Manufacturer_Part_Number=C1206C105K5RAC, Mouser Price/Stock=https://www.mouser.co.uk/ProductDetail/KEMET/C1206C105K5RAC?qs=NTAB53G5bVDYFBtoIe7UwQ%3D%3D
C15.1 C15.2: "Capacitor Polarised", Manufacturer_Name=Kemet, Datasheet Link=https://www.kemet.com/specsheet/A750MW687M1VAAE018, Height=18mm, Manufacturer_Part_Number=A750MW687M1VAAE018
C19.1 C19.2: "Capacitor", Manufacturer_Name=Kemet, Mouser Part Number=80-C0603C689C5G, Arrow Part Number=C0603C689C5GACTU, Arrow Price/Stock=https://www.arrow.com/en/products/c0603c689c5gactu/kemet-corporation, Datasheet Link=https://datasheet.datasheetarchive.com/originals/distributors/SFDatasheet-4/sf-00083929.pdf, Height=0.87mm, Manufacturer_Part_Number=C0603C689C5GACTU, Mouser Price/Stock=https://www.mouser.com/Search/Refine.aspx?Keyword=80-C0603C689C5G, Supplier 1=Mouser, Supplier Part Number 1=80-C0603C689C5G
C20.1 C20.2: "Capacitor", Manufacturer_Name=Kemet, Mouser Part Number=80-C0603C221K5R, Arrow Part Number=C0603C221K5RACTU, Arrow Price/Stock=https://www.arrow.com/en/products/c0603c221k5ractu/kemet-corporation, Datasheet Link=https://componentsearchengine.com/Datasheets/2/C0603C221K5RACTU.pdf, Height=0.87mm, Manufacturer_Part_Number=C0603C221K5RACTU, Mouser Price/Stock=https://www.mouser.co.uk/ProductDetail/KEMET/C0603C221K5RACTU?qs=mvqbjrnDhCzYtgiRXquOuQ%3D%3D, Supplier 1=Mouser, Supplier Part Number 1=80-C0603C221K5R
C21.1 C21.2 C34.1 C34.2: library part C0603C104K5RACTU, "Capacitor", Manufacturer_Name=Kemet, Mouser Part Number=80-C0603C104K5R, Supplier Part Number 1=80-C0603C102J5R, Arrow Part Number=C0603C104K5RACTU, Arrow Price/Stock=https://www.arrow.com/en/products/c0603c104k5ractu/kemet-corporation, Datasheet Link=http://www.farnell.com/datasheets/2205446.pdf, Height=0.95mm, Manufacturer_Part_Number=C0603C104K5RACTU, Mouser Price/Stock=https://www.mouser.co.uk/ProductDetail/KEMET/C0603C104K5RACTU?qs=l5k%252BbMnNDkkVcnZPSAaaiQ%3D%3D, Supplier 1=Mouser
C22.1 C22.2 C35.1 C35.2: "Capacitor", Manufacturer_Name=Kemet, Mouser Part Number=80-C1206C105M5RECTU, Arrow Part Number=C1206C105M5RECTU, Arrow Price/Stock=https://www.arrow.com/en/products/c1206c105m5rectu/kemet-corporation, Datasheet Link=https://content.kemet.com/datasheets/KEM_C1090_X7R_ESD.pdf, Height=1.3mm, Manufacturer_Part_Number=C1206C105M5RECTU, Mouser Price/Stock=https://www.mouser.co.uk/ProductDetail/KEMET/C1206C105M5RECTU?qs=55YtniHzbhBh39CxZCw85g%3D%3D, Supplier 1=Mouser, Supplier Part Number 1=80-C1206C105M5RECTU
C23.1 C23.2: "Capacitor", Manufacturer_Name=Kemet, Mouser Part Number=80-C1206X475M5RAUTO, Datasheet Link=https://www.kemet.com/specsheet/C1206X475M5RACAUTO, Height=1.95mm, Manufacturer_Part_Number=C1206X475M5RACAUTO, Mouser Price/Stock=https://www.mouser.co.uk/ProductDetail/KEMET/C1206X475M5RACAUTO?qs=%252B6g0mu59x7LXtOZABrHA3A%3D%3D, Supplier 1=Mouser, Supplier Part Number 1=80-C1206X475M5RAUTO
C24.1 C24.2: "Capacitor", Manufacturer_Name=Kemet, Mouser Part Number=80-C0603C474K4P, Arrow Part Number=C0603C474K4PACTU, Arrow Price/Stock=https://www.arrow.com/en/products/c0603c474k4pactu/kemet-corporation?region=nac, Datasheet Link=https://www.kemet.com/specsheet/C0603C474K4PACTU, Height=0.9mm, Manufacturer_Part_Number=C0603C474K4PACTU, Mouser Price/Stock=https://www.mouser.co.uk/ProductDetail/KEMET/C0603C474K4PACTU?qs=IOSO19fP00rNDeTfy1w%2Frw%3D%3D, Supplier 1=Mouser, Supplier Part Number 1=80-C0603C474K4P
C28.1 C28.2: library part C0603C104K5RACTU, "Capacitor", Manufacturer_Name=Kemet, Mouser Part Number=80-C0603C104K5R, Arrow Part Number=C0603C104K5RACTU, Arrow Price/Stock=https://www.arrow.com/en/products/c0603c104k5ractu/kemet-corporation, Datasheet Link=http://www.farnell.com/datasheets/2205446.pdf, Height=0.95mm, Manufacturer_Part_Number=C0603C104K5RACTU, Mouser Price/Stock=https://www.mouser.co.uk/ProductDetail/KEMET/C0603C104K5RACTU?qs=l5k%252BbMnNDkkVcnZPSAaaiQ%3D%3D, Supplier 1=Mouser, Supplier Part Number 1=80-C0603C104K5R
C29.1 C29.2: "Capacitor", Manufacturer_Name=TDK, Mouser Part Number=810-C3225X7R2A106K25, Datasheet Link=https://product.tdk.com/info/en/catalog/datasheets/mlcc_commercial_midvoltage_en.pdf, Height=2.3mm, Manufacturer_Part_Number=C3225X7R2A106K250AC, Mouser Price/Stock=https://www.mouser.co.uk/ProductDetail/TDK/C3225X7R2A106K250AC?qs=rSMjJ%252B1ewcQNu1nTZev8UA%3D%3D
IC1.1 IC1.2: "Integrated Circuit", Manufacturer_Name="Analog Devices", Mouser Part Number=584-LT8392JFE#PBF, Datasheet Link=https://www.mouser.co.uk/datasheet/2/609/lt8392-1921917.pdf, Height=1.2mm, Manufacturer_Part_Number=LT8392JFE#PBF, Mouser Price/Stock=https://www.mouser.co.uk/ProductDetail/Analog-Devices/LT8392JFEPBF?qs=zW32dvEIR3v19WKL6cpYug%3D%3D, Supplier 1=Mouser, Supplier Part Number 1=584-LT8392JFE#PBF
IC2: "Integrated Circuit", Arrow Part Number=MCP47FEB02A0-E/ST, Manufacturer_Name=Microchip, Mouser Part Number=579-MCP47FEB02A0EST, Arrow Price/Stock=https://www.arrow.com/en/products/mcp47feb02a0-est/microchip-technology?region=nac, Datasheet Link=http://www.microchip.com/mymicrochip/filehandler.aspx?ddocname=en573220, Height=1.2mm, Manufacturer_Part_Number=MCP47FEB02A0-E/ST, Mouser Price/Stock=https://www.mouser.co.uk/ProductDetail/Microchip-Technology/MCP47FEB02A0-E-ST?qs=rQCxX1QmdjKDJonwz1QvmA%3D%3D
IC3: "Integrated Circuit", Manufacturer_Name="Analog Devices", Mouser Part Number=584-ADUM1251ARZ, Arrow Part Number=ADUM1251ARZ, Arrow Price/Stock=https://www.arrow.com/en/products/adum1251arz/analog-devices?region=nac, Datasheet Link=https://datasheet.datasheetarchive.com/originals/distributors/Datasheets-DGA3/264898.pdf, Height=1.75mm, Manufacturer_Part_Number=ADUM1251ARZ, Mouser Price/Stock=https://www.mouser.co.uk/ProductDetail/Analog-Devices/ADUM1251ARZ?qs=WIvQP4zGani5W7Ldr0QsZA%3D%3D, Supplier 1=Mouser, Supplier Part Number 1=584-ADUM1251ARZ
IC4.1 IC4.2: "Integrated Circuit", Manufacturer_Name="Analog Devices", Mouser Part Number=584-LTC4372CMS8TRPBF, Arrow Part Number=LTC4372CMS8#TRPBF, Arrow Price/Stock=https://www.arrow.com/en/products/ltc4372cms8trpbf/analog-devices, Datasheet Link=https://www.arrow.com/en/products/ltc4372cms8trpbf/analog-devices, Height=1.1mm, Manufacturer_Part_Number=LTC4372CMS8#TRPBF, Mouser Price/Stock=https://www.mouser.co.uk/ProductDetail/Analog-Devices/LTC4372CMS8TRPBF?qs=T94vaHKWudSmRk6S7wUTVw%3D%3D, Supplier 1=Mouser, Supplier Part Number 1=584-LTC4372CMS8TRPBF
IC5: "Integrated Circuit", Manufacturer_Name=Skyworks, Mouser Part Number=634-SI8640EB-B-IU, Datasheet Link=https://www.mouser.in/datasheet/2/472/si864x_datasheet-2507790.pdf, Height=1.75mm, Manufacturer_Part_Number=SI8640EB-B-IU, Mouser Price/Stock=https://www.mouser.co.uk/ProductDetail/Skyworks-Solutions-Inc/SI8640EB-B-IU?qs=1mbolxNpo8djAX8%252BwHCeQQ%3D%3D
J1: "Connector", Manufacturer_Name=Molex, Mouser Part Number=538-46437-3001, Datasheet Link=https://componentsearchengine.com/Datasheets/1/46437-3007.pdf, Height=10mm, Manufacturer_Part_Number=46437-3001, Mouser Price/Stock=https://www.mouser.com/Search/Refine.aspx?Keyword=538-46437-3007, System=Connector
J2: "Connector", Manufacturer_Name="Keystone Electronics", Mouser Part Number=534-980, Datasheet Link=https://www.keyelco.com/product.cfm/product_id/2402, Height=4.14mm, Manufacturer_Part_Number=980TR, Mouser Price/Stock=https://www.mouser.co.uk/ProductDetail/Keystone-Electronics/980TR?qs=sOYabIlKNmdpbsH5J2zkLQ%3D%3D
L2.1 L2.2: "Inductor", Manufacturer_Name=Bourns, Mouser Part Number=652-PQ2614BHA-100K, Arrow Part Number=PQ2614BHA-100K, Arrow Price/Stock=https://www.arrow.com/en/products/pq2614bha-100k/bourns?region=nac, Datasheet Link=https://www.bourns.com/docs/Product-Datasheets/PQ2614.pdf, Height=16mm, Manufacturer_Part_Number=PQ2614BHA-100K, Mouser Price/Stock=https://www.mouser.co.uk/ProductDetail/Bourns/PQ2614BHA-100K?qs=1mbolxNpo8cus7p6tzCJzA%3D%3D, Supplier 1=Mouser, Supplier Part Number 1=652-PQ2614BHA-100K
PS1: "Power Supply", Arrow Part Number=MCP1799T-3302H/TT, Manufacturer_Name=Microchip, Mouser Part Number=579-CP1799T-3302H/TT, Arrow Price/Stock=https://www.arrow.com/en/products/mcp1799t-3302htt/microchip-technology?region=nac, Datasheet Link=https://ms.componentsearchengine.com/Datasheets/1/MCP1799T-3302H_TT.pdf, Height=1.12mm, Manufacturer_Part_Number=MCP1799T-3302H/TT, Mouser Price/Stock=https://www.mouser.co.uk/ProductDetail/Microchip-Technology-Atmel/MCP1799T-3302H-TT?qs=BJlw7L4Cy78EAGTR6Iuibw%3D%3D, Supplier 1=Mouser, Supplier Part Number 1=579-CP1799T-3302H/TT
Q1.1 Q1.2 Q2.1 Q2.2 Q3.1 Q3.2 Q4.1 Q4.2: "MOSFET (N-Channel)", Manufacturer_Name=Infineon, Mouser Part Number=726-BSZ034N04LS, Datasheet Link=https://www.infineon.com/dgdl/Infineon-BSZ034N04LS-DS-v02_01-EN.pdf?fileId=db3a304342371bb001424c3fe5bc7083, Manufacturer_Part_Number=BSZ034N04LS, Mouser Price/Stock=https://www.mouser.co.uk/ProductDetail/Infineon-Technologies/BSZ034N04LS?qs=y2kkmE52mdOs9jAiLVqcEw%3D%3D, Supplier 1=Mouser, Supplier Part Number 1=726-BSZ034N04LS
Q5.1 Q5.2 Q6.1 Q6.2: library part CMP-32901-000166-1, "MOSFET N-CH 60V 30A TDSON-8", Continuous Drain Current=30A, Drain To Source Breakdown Voltage=60V, Drain To Source Resistance=1.4mΩ, Gate To Source Voltage=20V, Input Capacitace At Vds="5200pF @ 30V", Manufacturer=Infineon, Max Forward Diode Voltage=1.2V, Max Junction Temp=+150°C, Package=PG-TDSON-8, Power Dissipation=2.5W, Pulse Drain Current=400A, Temperature="-55°C to +150°C", Temperature Range Low=-55°C, Typ Forward Diode Voltage=0.9V, Automotive=No, Category=Trans, ComponentLink2Description=Datasheet, ComponentLink2URL=https://www.infineon.com/dgdl/Infineon-BSC016N06NS-DS-v02_01-en.pdf?fileId=db3a3043353fdc160135532b353c483c, Depletion Mode=False, Device Class L1="Discrete Semiconductors", Device Class L2=Transistors, Device Class L3=MOSFETs, Digikey Description="MOSFET N-CH 60V 30A TDSON-8", Drain To Source Voltage=60V, Footprint Url=https://www.infineon.com/cms/en/product/packages/PG-TDSON/PG-TDSON-8-17/, Gate Charge At Vgs="71nC @ 10V", Height=1.1mm, Lead Free=Yes, Manufacturer Part Number=BSC016N06NSATMA1, Number Of Channels=1, Number Of N Channels=1, Octopart=https://octopart.com/bsc016n06nsatma1-infineon-23421881, Reverse Recovery Charge=78nC, Reverse Recovery Time=61ns, RoHS=TRUE, Rthja Max=50K/W, Temperature Range High=+150°C, Threshold Vgs Max=3.3V, Threshold Vgs Min=2.1V, Transconductance=140S, Turn Off Delay Time=35ns, Turn On Delay Time=19ns
R1.1 R1.2: "Resistor", Manufacturer_Name=Ohmite, Mouser Part Number=588-PCS1206FR0030ET, Datasheet Link=https://componentsearchengine.com/Datasheets/2/PCS1206FR0030ET.pdf, Height=0.684mm, Manufacturer_Part_Number=PCS1206FR0030ET, Mouser Price/Stock=https://www.mouser.co.uk/ProductDetail/Ohmite/PCS1206FR0030ET?qs=Zz7%252BYVVL6bGHVp6IC0W8ig%3D%3D, Supplier 1=Mouser, Supplier Part Number 1=588-PCS1206FR0030ET
R2.1 R2.2 R7 R8: library part CRCW0603100KFKEAC, "Resistor", Manufacturer_Name=Vishay, Mouser Part Number=71-CRCW0603100KFKEAC, Supplier Part Number 1=71-CRCW0603100KJNEAC, Arrow Part Number=CRCW0603100KFKEAC, Arrow Price/Stock=https://www.arrow.com/en/products/crcw0603100kfkeac/vishay, Datasheet Link=https://www.mouser.com/datasheet/2/427/crcwce3-1223726.pdf, Height=0.55mm, Manufacturer_Part_Number=CRCW0603100KFKEAC, Mouser Price/Stock=https://www.mouser.co.uk/ProductDetail/Vishay-Dale/CRCW0603100KFKEAC?qs=E3Y5ESvWgWPxzfNYyMgX1w%3D%3D, Supplier 1=Mouser
R3 R6: "Resistor", Manufacturer_Name=Vishay, Mouser Part Number=71-CRCW0603-4.32K-E3, Arrow Part Number=CRCW06034K32FKEA, Arrow Price/Stock=https://www.arrow.com/en/products/crcw06034k32fkea/vishay, Datasheet Link=http://www.vishay.com/docs/20035/dcrcwe3.pdf, Height=0.5mm, Manufacturer_Part_Number=CRCW06034K32FKEA, Mouser Price/Stock=https://www.mouser.com/Search/Refine.aspx?Keyword=71-CRCW0603-4.32K-E3, Supplier 1=Mouser, Supplier Part Number 1=71-CRCW0603-4.32K-E3
R4.1 R4.2: library part CRCW0603316KFKTA, "Resistor", Manufacturer_Name=Vishay, Mouser Part Number=71-CRCW0603-316K, Supplier Part Number 1=71-CRCW0603255KFKEAC, Datasheet Link=http://www.vishay.com/docs/20035/dcrcwe3.pdf, Height=0.5mm, Manufacturer_Part_Number=CRCW0603316KFKTA, Mouser Price/Stock=https://www.mouser.co.uk/ProductDetail/Vishay-Dale/CRCW0603316KFKTA?qs=rSCQ%2F9oRLB67bniFfnYAjQ%3D%3D, Supplier 1=Mouser
R5.1 R5.2: "Resistor", Manufacturer_Name=Vishay, Mouser Part Number=71-CRCW0603-316K, Datasheet Link=http://www.vishay.com/docs/20035/dcrcwe3.pdf, Height=0.5mm, Manufacturer_Part_Number=CRCW0603316KFKTA, Mouser Price/Stock=https://www.mouser.co.uk/ProductDetail/Vishay-Dale/CRCW0603316KFKTA?qs=rSCQ%2F9oRLB67bniFfnYAjQ%3D%3D, Supplier 1=Mouser, Supplier Part Number 1=71-CRCW0603-316K
R9 R10: library part CRCW06037K50FKEB, "Resistor", Manufacturer_Name=Vishay, Mouser Part Number=71-CRCW06037K50FKEB, Supplier Part Number 1=71-CRCW060322K1FKEB, Datasheet Link=http://www.vishay.com/docs/20035/dcrcwe3.pdf, Height=0.5mm, Manufacturer_Part_Number=CRCW06037K50FKEB, Mouser Price/Stock=https://www.mouser.co.uk/ProductDetail/Vishay-Dale/CRCW06037K50FKEB?qs=2ihuRUavkaTvW2vO4EimMQ%3D%3D, Supplier 1=Mouser
R18 R19: library part CRCW06035K62FKEB, "Resistor", Manufacturer_Name=Vishay, Mouser Part Number=71-CRCW06035K62FKEB, Supplier Part Number 1=71-CRCW06035K60JNEAC, Datasheet Link=http://www.vishay.com/docs/20035/dcrcwe3.pdf, Height=0.5mm, Manufacturer_Part_Number=CRCW06035K62FKEB, Mouser Price/Stock=https://www.mouser.co.uk/ProductDetail/Vishay-Dale/CRCW06035K62FKEB?qs=P6ImCWcZKGBvDktlVJxa7w%3D%3D, Supplier 1=Mouser
R24.1 R24.2 R25.1 R25.2: library part CRCW0603100RFKEBC, "Resistor", Manufacturer_Name=Vishay, Mouser Part Number=71-CRCW0603100RFKEBC, Arrow Part Number=CRCW0603100RFKEBC, Arrow Price/Stock=https://www.arrow.com/en/products/crcw0603100rfkebc/vishay?region=nac, Datasheet Link=https://www.vishay.com/docs/28773/crcwce3.pdf, Height=0.55mm, Manufacturer_Part_Number=CRCW0603100RFKEBC, Mouser Price/Stock=https://www.mouser.co.uk/ProductDetail/Vishay-Dale/CRCW0603100RFKEBC?qs=wd5RIQLrsJhdvQFtBw4oWg%3D%3D
R30.1 R30.2: library part CRCW06038K87FKEA, "Resistor", Manufacturer_Name=Vishay, Mouser Part Number=71-CRCW0603-8.87K-E3, Supplier Part Number 1=71-CRCW0603-8.87K, Arrow Part Number=CRCW06038K87FKEA, Arrow Price/Stock=https://www.arrow.com/en/products/crcw06038k87fkea/vishay, Datasheet Link=http://www.vishay.com/docs/20035/dcrcwe3.pdf, Height=0.5mm, Manufacturer_Part_Number=CRCW06038K87FKEA, Mouser Price/Stock=https://www.mouser.co.uk/ProductDetail/Vishay-Dale/CRCW06038K87FKEA/?qs=CuWZN%2F5Vbiq36sz1Lp02wA%3D%3D, Supplier 1=Mouser

## Via types
v1: diameter 0.7, hole 0.3, Top Layer to Bottom Layer, 564 vias
v2: diameter 6, hole 3.4, Top Layer to Bottom Layer, 3 vias

## Nets (pads, with @x,y where several pads share a name; then routed paths per layer and width w, separated by ;. In a path a pad name is that pad's centre, name@x,y a point inside that pad or via, vN(x,y) a via of type N, cw(c..) or ccw(c..) an arc to the next point about the centre after c; other vN are vias at no path point)
24V.1: C6.1.1 C8.1.1 C10.1.2 C12.1.2 C13.1.2 C16.1.2 C35.1.1 IC1.1.24 IC4.1.4 Q1.1.1 Q1.1.2 Q1.1.3 Q1.1.4 Q5.1.5-6-7-8 R7.2 | length 74.1
  Top Layer w0.254: Q5.1.5-6-7-8@17.535,20.675 17.535,20.745 19.613,22.823 20.123,22.823 20.568,23.267 20.568,24.752 20.666,24.85 IC4.1.4@21.153,24.85 ; v1(78.467,21.5) 79.55,21.5 C35.1.1@79.6,21.45 79.847,21.697 79.847,22.918 79.996,23.067 82.396,23.067 IC1.1.24@82.427,23.098
  Bottom Layer w0.254: v1(35.3,5.8) 35.294,5.806 35.294,14.594 41.046,20.346 75.946,20.346 77.131,21.531 v1@78.469,21.531 ; v1(77.136,28.55) 77.136,22.864 78.467,21.533 v1(78.467,21.5)
  other v1: 34.5,2.5 36.5,2.5 38.5,2.5 40.5,2.5 42.5,2.5 44.5,2.5 46.5,2.5 48.5,2.5 50.5,2.5 52.5,2.5 54.5,2.5 56.5,2.5 62.1,2.5 63.5,2.5 64.9,2.5 66.3,2.5 67.7,2.5 69.1,2.5 71,2.5 73,2.5 75,2.5 77,2.5 79,2.5 81,2.5 83,2.5 85,2.5 89,2.5 62.8,2.9 64.2,2.9 65.6,2.9 67,2.9 68.4,2.9 62.1,3.3 63.5,3.3 64.9,3.3 66.3,3.3 67.7,3.3 69.1,3.3 62.8,3.7 64.2,3.7 65.6,3.7 67,3.7 68.4,3.7 16.1,19.7 17.5,19.7 18.9,19.7 16.8,20.1 18.2,20.1 16.1,20.5 17.5,20.5 18.9,20.5 16.8,20.9 18.2,20.9 16.1,21.3 17.5,21.3 18.9,21.3 16.8,21.7 18.2,21.7 17.535,22.025 16.1,22.1 18.9,22.1 16.8,22.5 18.2,22.5
24V.2: C6.2.1 C8.2.1 C10.2.2 C12.2.2 C13.2.2 C16.2.2 C35.2.1 IC1.2.24 IC4.2.4 Q1.2.1 Q1.2.2 Q1.2.3 Q1.2.4 Q5.2.5-6-7-8 R8.2 | length 42.3
  Top Layer w0.254: Q5.2.5-6-7-8@17.3,47.47 Q5.2.5-6-7-8@18.765,48.935 ; v1(18.7,49) 19.04,49 20.387,50.347 20.387,51.147 20.485,51.245 IC4.2.4@20.973,51.245 ; IC1.2.24@88.277,36.898 88.304,36.925 90.825,36.925 91.102,37.202 C35.2.1@91.102,38.523 91.1,38.525 v1(91.1,40.2)
  Bottom Layer w0.254: C8.2.1@87.5,56.75 90.773,53.477 90.773,40.572 91.1,40.245 v1(91.1,40.2) 92,41.1 93.1,41.1 94.3,39.9 94.3,36.01 93.7,35.41 v1(93.7,31.677)
  other v1: 16.6,46.2 18,46.2 15.9,46.6 17.3,46.6 18.7,46.6 16.6,47 18,47 15.9,47.4 17.3,47.4 18.7,47.4 16.6,47.8 18,47.8 15.9,48.2 17.3,48.2 18.7,48.2 16.6,48.6 18,48.6 15.9,49 17.3,49 65.6,55.6 64.9,56 66.3,56 67.7,56 65.6,56.4 67,56.4 68.4,56.4 64.9,56.8 66.3,56.8 67.7,56.8 65.6,57.2 67,57.2 68.4,57.2 63.5,57.6 64.9,57.6 66.3,57.6 67.7,57.6 62.8,58 64.2,58 65.6,58 67,58 63.5,58.4 64.9,58.4 66.3,58.4 62.8,58.8 64.2,58.8 65.6,58.8 67,58.8 63.5,59.2 64.9,59.2 66.3,59.2
24V_COMP.1: C19.1.2 IC1.1.20 R4.1.2 | length 4.6
  Top Layer w0.254: R4.1.2@78.302,25.323 79.552,25.323 C19.1.2@79.602,25.273 79.702,25.273 79.965,25.536 79.965,25.647 80.295,25.977 81.497,25.977 81.678,25.796 82.329,25.796 IC1.1.20@82.427,25.698
24V_COMP.2: C19.2.2 IC1.2.20 R4.2.2 | length 4.6
  Top Layer w0.254: IC1.2.20@88.277,34.298 88.375,34.2 89.026,34.2 89.207,34.019 90.397,34.019 90.531,34.153 90.531,34.156 90.739,34.364 90.739,34.46 91.002,34.723 C19.2.2@91.102,34.723 91.152,34.673 R4.2.2@92.402,34.673
24V_FB.1: C20.1.2 IC1.1.19 R3.1 R7.1 R9.1 | length 63.5
  Top Layer w0.254: v1(75.78,28.7) 75.85,28.63 75.85,27.099 75.999,26.95 R7.1@77,26.95 77.05,27 78.3,27 79.675,27 80.319,26.356 82.419,26.356 IC1.1.19@82.427,26.348
  Bottom Layer w0.254: v1(75.78,28.7) 75.661,28.7 74.815,29.546 61.539,29.546 61.239,29.246 60.489,29.246 60,29.735 60,30.294 60.506,30.8 61.216,30.8 61.555,30.461 74.861,30.461 75.175,30.775 94.575,30.775 96.215,32.415 96.215,32.865 v1(96.3,32.95)
24V_FB.2: C20.2.2 IC1.2.19 R6.1 R8.1 R10.1 | length 7
  Top Layer w0.254: IC1.2.19@88.277,33.648 88.279,33.646 90.329,33.646 91.025,32.95 R6.1@91.1,32.95 92.402,32.95 93.7,32.95 R10.1@95,32.95
24VA_CTRL: IC1.1.9 IC5.14 R2.1.1 R30.1.2 | length 95.1
  Top Layer w0.254: IC5.14@22.95,4.202 22.952,4.2 24.4,4.2 25.4,5.2 25.4,5.853 26.104,6.557 v1(26.216,6.557) ; IC1.1.9@88.277,25.698 88.375,25.796 89.275,25.796 89.679,26.2 89.892,26.2 90.172,26.48 91.022,26.48 91.466,26.923 R30.1.2@93.302,26.923 93.227,26.923 92.929,26.625 92.929,26.503 92.902,26.476 92.902,23.17 92.929,23.143 92.929,23.021 93.277,22.673 R2.1.1@93.302,22.673
  Bottom Layer w0.254: v1(26.216,6.557) 40.459,20.8 75.6,20.8 76.5,21.7 76.5,28.087 76.359,28.228 76.359,29.007 76.897,29.546 88.8,29.546 89.8,28.546 v1(89.8,26.2)
24VA_INJ: IC2.3 R9.2 | length 2.3
  Top Layer w0.254: IC2.3@95.175,29.638 95.273,29.736 95.273,30.423 95.927,31.077 95.927,31.152 96.225,31.45 R9.2@96.3,31.45
24VA_OUT: C29.1.2 IC4.1.1 J1.P4 Q6.1.5-6-7-8 | length 3.6
  Top Layer w0.254: IC4.1.1@21.153,26.8 21.153,27.675 21.492,28.014 21.492,29.742 C29.1.2@21.825,30.075
  other v1: 16.8,28.5 18.2,28.5 17.5,28.9 18.9,28.9 16.099,28.931 16.8,29.3 18.2,29.3 17.5,29.7 18.9,29.7 16.099,29.731 16.8,30.1 18.2,30.1 17.5,30.5 18.9,30.5 16.099,30.531 16.8,30.9 18.2,30.9 17.5,31.3 18.9,31.3 16.099,31.331
24VA_SHDN: IC4.1.8 IC5.12 | length 28.6
  Top Layer w0.254: IC5.12@22.95,2.932 23.041,3.023 23.915,3.023 24.381,3.488 24.888,3.488 25.715,4.315 26.015,4.315 v1(26.1,4.4) ; v1(23.75,26.25) 24.3,26.8 IC4.1.8@25.577,26.8
  Bottom Layer w0.254: v1(23.75,26.25) 25.212,24.788 25.212,5.344 26.1,4.456 v1(26.1,4.4)
24VB_CTRL: IC1.2.9 IC5.13 R2.2.1 R30.2.2 | length 115.2
  Top Layer w0.254: IC5.13@22.95,3.568 23.041,3.659 24.048,3.659 24.233,3.844 24.644,3.844 26.019,5.219 26.019,5.445 v1(26.104,5.53) ; R2.2.1@77.402,37.323 77.4,37.321 v1(77.4,35.3) 77.4,33.075 R30.2.2@77.402,33.073 79.239,33.073 79.665,33.5 80.709,33.5 81.409,34.2 82.329,34.2 IC1.2.9@82.427,34.298
  Bottom Layer w0.254: v1(26.104,5.53) 26.104,5.634 25.6,6.138 25.6,6.869 25.931,7.2 26.3,7.2 40.308,21.208 74.208,21.208 75,22 75,27.5 73.666,28.834 61.834,28.834 61.488,28.488 60.192,28.488 59.288,29.392 59.288,30.603 60.193,31.508 60.201,31.508 60.205,31.512 61.511,31.512 61.85,31.173 73.773,31.173 77.387,34.787 77.387,35.287 v1(77.4,35.3)